# Allegro board tmacontrol.brd
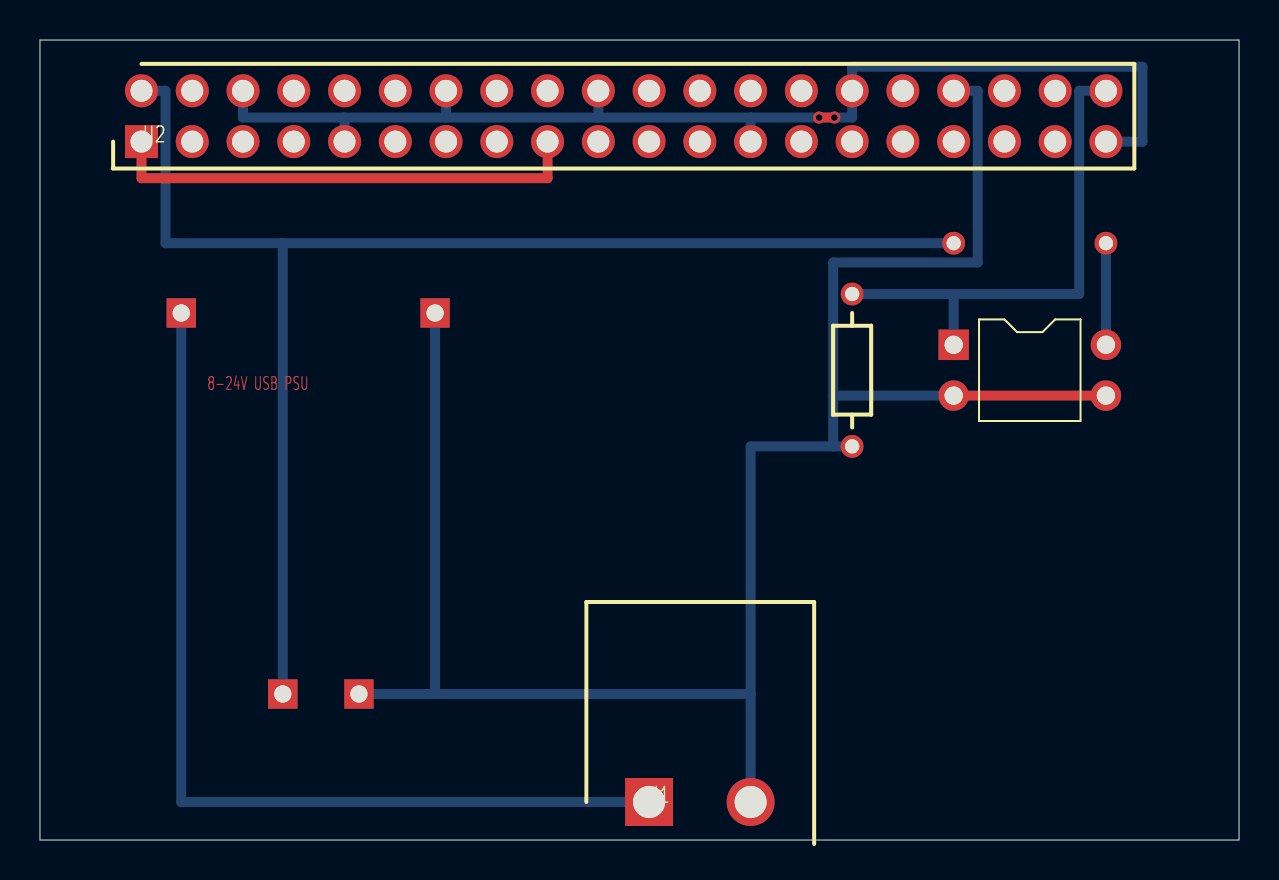
[diagram p0: board, top side]
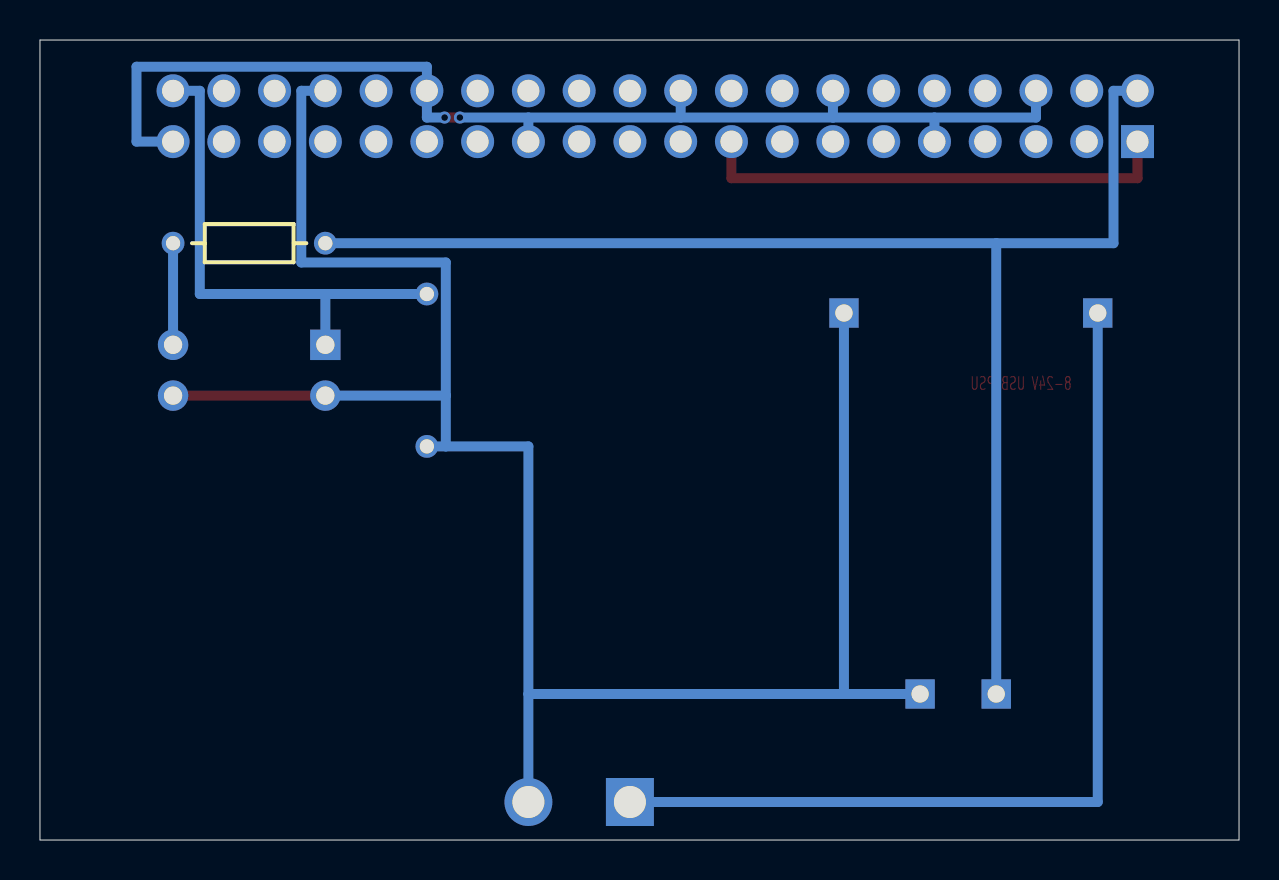
[diagram p1: board, bottom side, seen from below]

Outline 60 x 40 mm; copper layers: TOP, BOTTOM. Coordinates in mm from the lower left corner of the outline.
Outline path: 0,40 0,0 60,0 60,40 0,40

## Design rules (mm)
constraint set DEFAULT: min track width 0.5

## Placement (name value [footprint] x y rotation side)
J1  HEADER 2  [SHDRRA2W100P0X508_1X2_1140X1210X830P]  30.48 1.9 0 top
R1  10k  [AXRC05]  40.64 27.3 270 top
R2  4.7k  [AXRC05]  53.34 29.84 180 bottom
U1  PC817  [DIP4_3]  45.72 24.76 0 top
U2  RASPBERRY_PI_3_MODEL_B+  [HDRV40W64P254X254_2X20_5080X508X869P]  5.08 34.92 0 top
U3  12V5V_PSU  [PSU_12V_5V_USB]  12.7 17.14 0 top

## Library data of the parts
J1 = HEADER 2
R1 R2 = R
U1 = PC816: Tolerance: ***; User Part Number: ***
U2 = RASPBERRY_PI_3_MODEL_B+_0
U3 = 12V5V_PSU

## Footprints (pads in the part's own frame, mm; a bottom-side part is the same pattern mirrored in y, then rotated)
AXRC05
  round 1.143 hole 0.711: 1(0,0) 2(7.62,0)
DIP4_3
  rect 1.524x1.524 hole 0.914: 1(0,0)
  round 1.524 hole 0.914: 2(0,-2.54) 3(7.62,-2.54) 4(7.62,0)
HDRV40W64P254X254_2X20_5080X508X869P
  rect 1.65x1.65 hole 1.1: 1(0,0)
  round 1.65 hole 1.1: 2(0,2.54) 3(2.54,0) 4(2.54,2.54) 5(5.08,0) 6(5.08,2.54) 7(7.62,0) 8(7.62,2.54) 9(10.16,0) 10(10.16,2.54) 11(12.7,0) 12(12.7,2.54) 13(15.24,0) 14(15.24,2.54) 15(17.78,0) 16(17.78,2.54) 17(20.32,0) 18(20.32,2.54) 19(22.86,0) 20(22.86,2.54) 21(25.4,0) 22(25.4,2.54) 23(27.94,0) 24(27.94,2.54) 25(30.48,0) 26(30.48,2.54) 27(33.02,0) 28(33.02,2.54) 29(35.56,0) 30(35.56,2.54) 31(38.1,0) 32(38.1,2.54) 33(40.64,0) 34(40.64,2.54) 35(43.18,0) 36(43.18,2.54) 37(45.72,0) 38(45.72,2.54) 39(48.26,0) 40(48.26,2.54)
PSU_12V_5V_USB
  rect 1.473x1.473 hole 0.864: 1(-5.63,9.21) 2(7.07,9.21) 3(3.26,-9.84) 4(-0.55,-9.84)
SHDRRA2W100P0X508_1X2_1140X1210X830P
  rect 2.4x2.4 hole 1.6: 1(0,0)
  round 2.4 hole 1.6: 2(5.08,0)

## Nets
3V3: U2.1 U2.17
5V0: U2.4
GND: U2.6 U2.9 U2.14 U2.20 U2.25 U2.30 U2.39
0: J1.2 R1.2 U1.2 U1.3 U2.34 U3.2 U3.3
GPIO.5V: R2.2 U2.2 U3.4(VCC)
GPIO.28.PIN38: U2.38
GPIO.29.PIN40: R1.1 U1.1 U2.40
PTT.PIN3: R2.1 U1.4(D)
N22821: J1.1 U3.1

Pads without a net: U2 3 5 7 8 10 11 12 13 15 16 18 19 21 22 23 24 26 27 28 29 31 32 33 35 36 37

## Via types
v1: diameter 0.61, hole 0.33, TOP to BOTTOM, 2 vias

## Routing (per net, layer and track width the routed paths; a pad name or vN(x,y) marks a point on that pad's centre or on a via; arc(x,y) is an arc through that point)
3V3: length 24
  TOP w0.5: U2.1 5.08,33.09 25.4,33.09 U2.17
GND: length 59.5
  TOP w0.5: v1(39.75,36.12) v1(38.99,36.12)
  BOTTOM w0.5: 15.24,36.12 20.32,36.12 ; 15.24,36.12 U2.9 ; 15.24,36.12 10.16,36.12 U2.6 ; 20.32,36.12 27.94,36.12 ; 20.32,36.12 U2.14 ; U2.39 55.17,34.92 55.17,38.66 40.64,38.66 U2.30 40.64,36.12 v1(39.75,36.12) ; 35.56,36.12 v1(38.99,36.12) ; 35.56,36.12 U2.25 ; 35.56,36.12 27.94,36.12 ; U2.20 27.94,36.12
0: length 101.4
  TOP w0.5: U1.3 U1.2
  BOTTOM w0.5: R1.2 39.69,19.68 ; 39.69,19.68 35.56,19.68 35.56,7.3 ; 39.69,19.68 39.69,22.22 ; U3.3 19.77,7.3 ; 19.77,7.3 U3.2 ; 19.77,7.3 35.56,7.3 ; U2.34 46.92,37.46 46.92,28.88 39.69,28.88 39.69,22.22 ; 35.56,7.3 J1.2 ; 39.69,22.22 U1.2
GPIO.5V: length 70.8
  BOTTOM w0.5: U3.4 12.15,29.84 ; 12.15,29.84 R2.2 ; 12.15,29.84 6.28,29.84 6.28,37.46 U2.2
GPIO.29.PIN40: length 25.4
  BOTTOM w0.5: U1.1 45.72,27.3 ; 45.72,27.3 R1.1 ; 45.72,27.3 52,27.3 52,37.46 U2.40
PTT.PIN3: length 5.1
  BOTTOM w0.5: U1.4 R2.1
N22821: length 47.9
  BOTTOM w0.5: J1.1 7.07,1.9 U3.1
